# Altium PCB fat34.PcbDoc
Units mm, origin at the board's own origin, x right, y up, seen from the top; angles counter-clockwise.
Board outline 354.7 x 156.7 mm, 2 copper layers (Top Layer, Bottom Layer); 91 components, 541 nets, 370 pads, 259 vias.
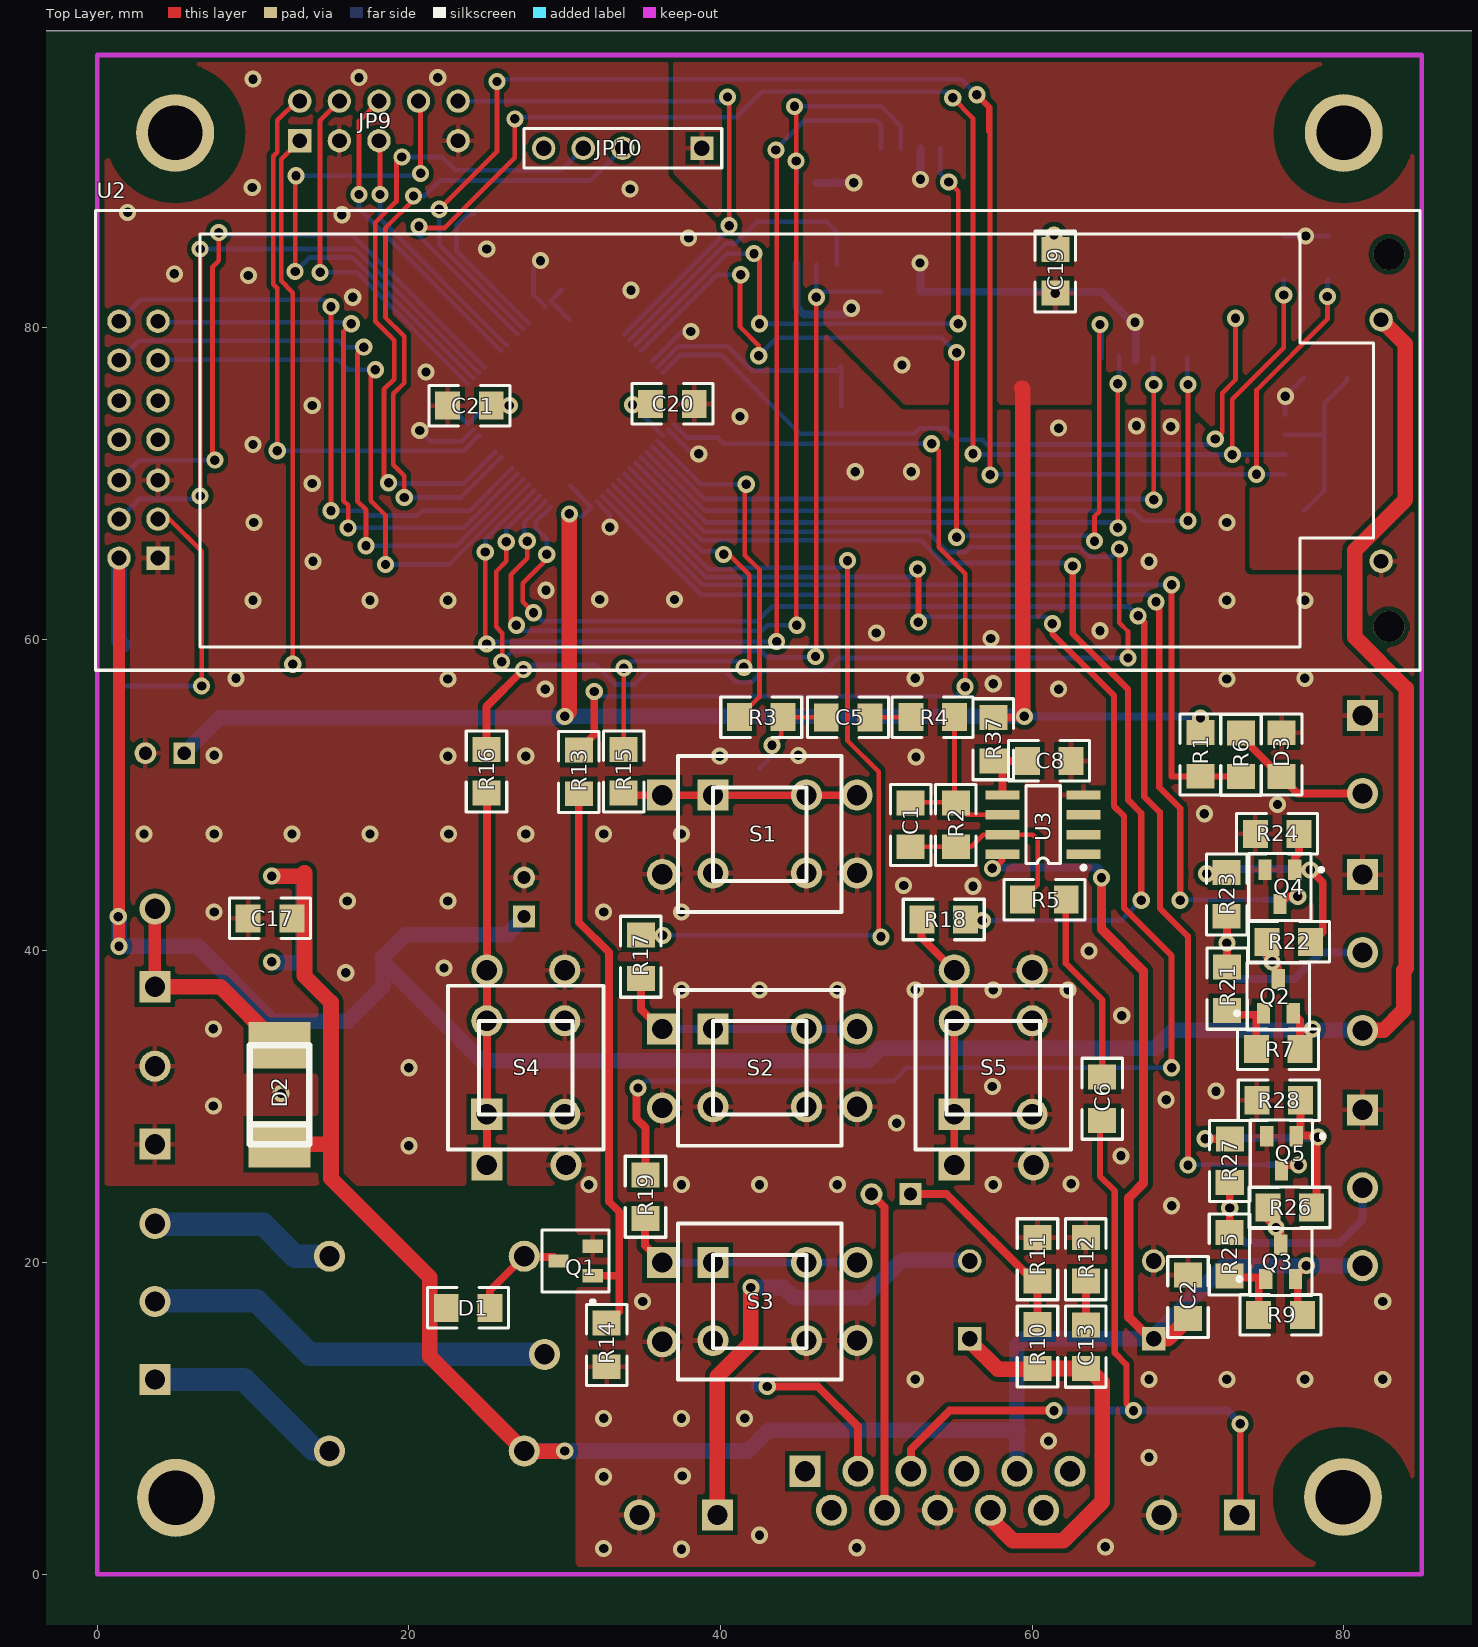
[diagram p0: Top Layer view]
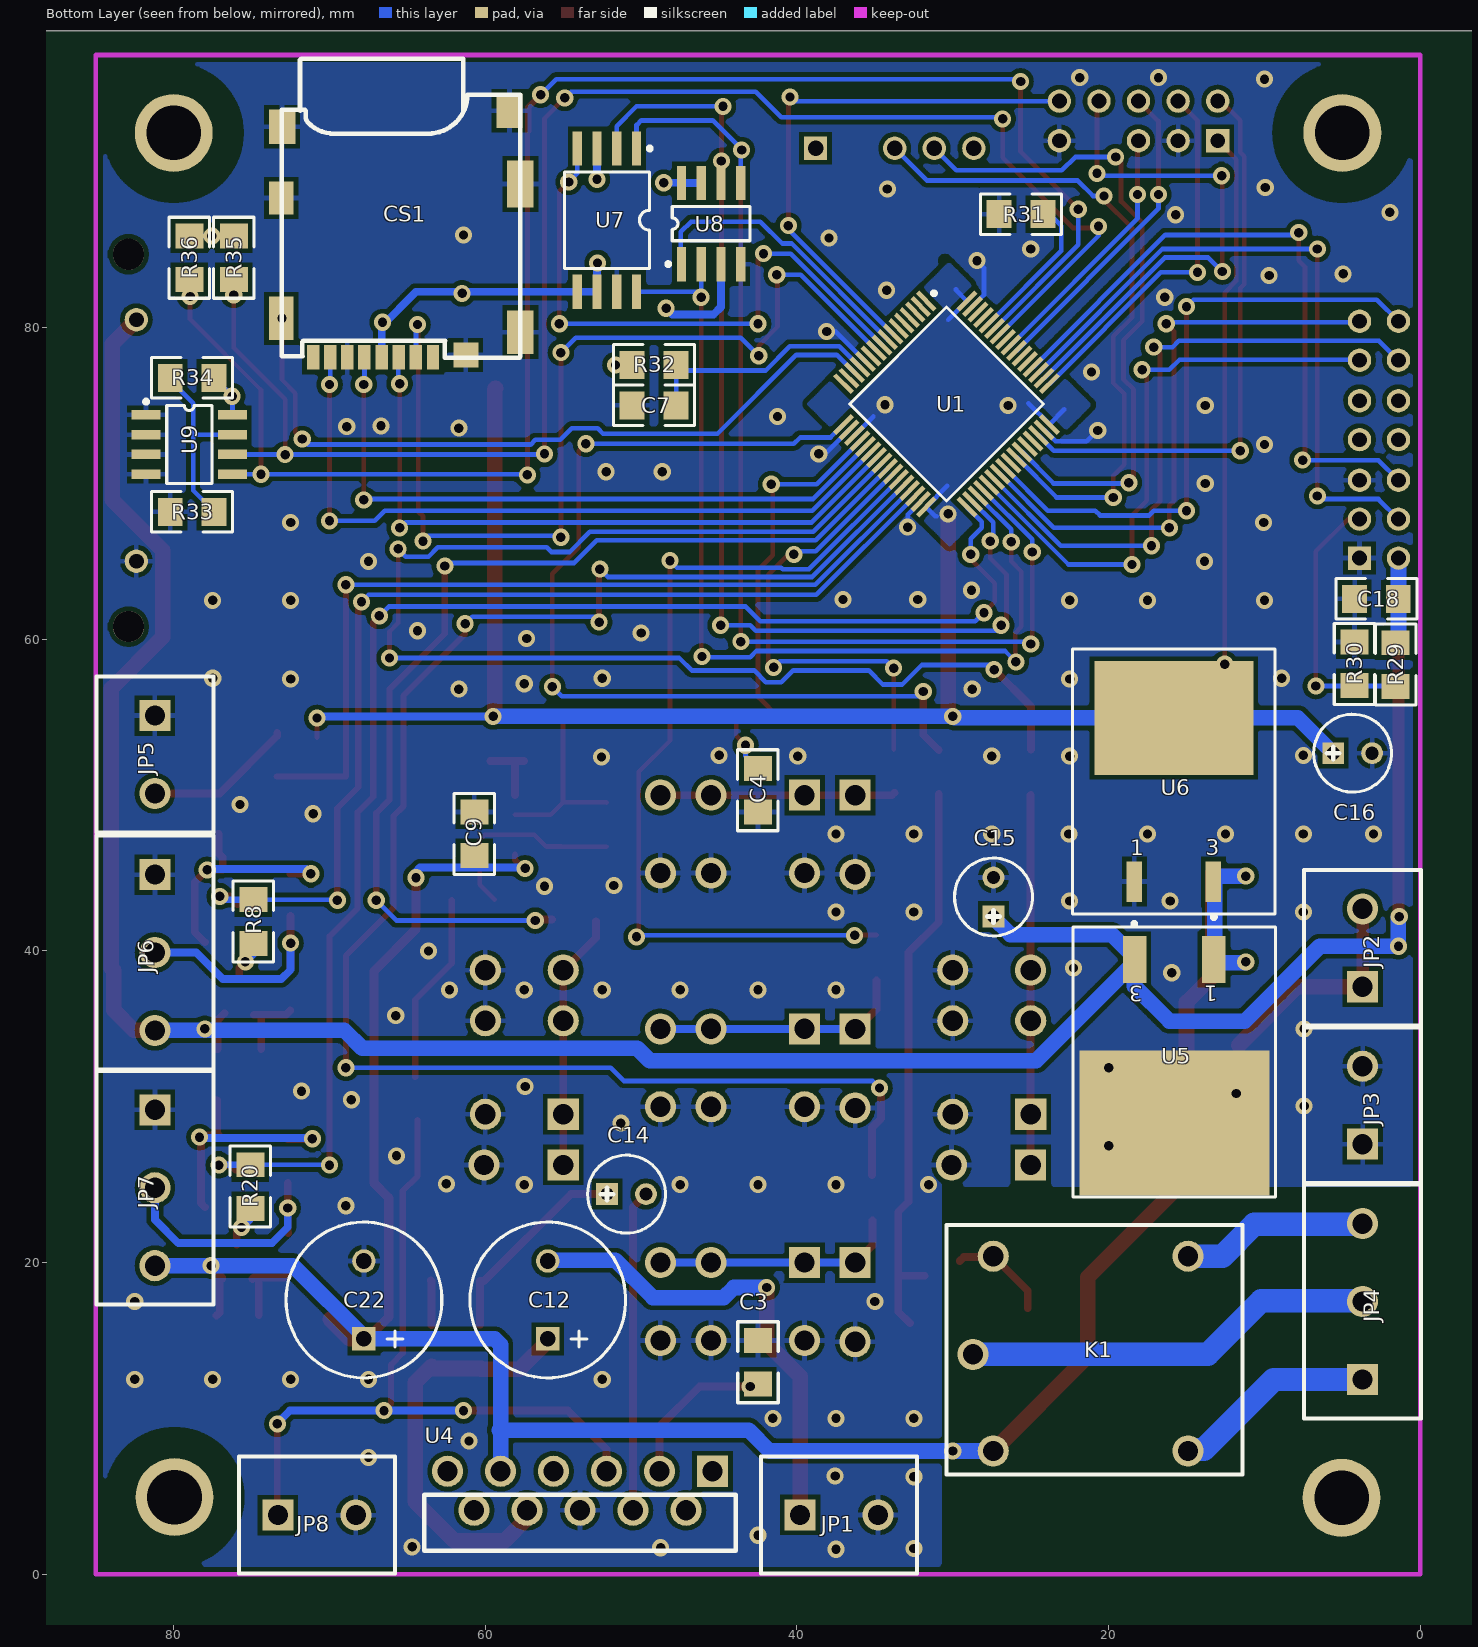
[diagram p1: Bottom Layer view, seen from below]

## Layer stack, top to bottom
Top Layer: signal copper 0.0356
Dielectric: dielectric 0.32, FR-4, Dk 4.8
Bottom Layer: signal copper 0.0356

## Board outline
-133.45,103.2 -133.45,-53.5 220.55,-53.5 220.55,99.05 -133.8,99.05 -133.8,-53.5 -134.15,-53.5

## Design rules (kind name [scope] priority, off if disabled: settings)
Clearance Clearance_1 [InPoly vs HasPad('Free-0')] p1: gap=2
Clearance Keep_Out [OnLayer('Keep-Out Layer')] p2: gap=0.3
Clearance Poly [InPoly] p3: gap=0.3
Clearance [All] p4: gap=0.2
ComponentClearance [All] p1: gap=0.254 collisioncheckmode=0
HoleSize [All] p1: absolutevalues=TRUE maxlimit=5 minlimit=0.025 maxpercent=80.000 minpercent=20.000
PolygonConnect PolygonConnect_1 [InComponent(U5)] p1: connectstyle=Direct reliefconductorwidth=0.254 reliefentries=4 polygonreliefangle="90 Angle"
PolygonConnect [All] p2: connectstyle=Relief reliefconductorwidth=0.3 reliefentries=4 polygonreliefangle="90 Angle"
RoutingLayers [All] p1: top layer=Horizontal bottom layer=Vertical
RoutingVias [All] p1: holewidth=0.6 width=1.1 viastyle="Through Hole" minholewidth=0.6 minwidth=1.1 maxholewidth=0.7 maxwidth=1.2
SolderMaskExpansion [All] p1: expansion=0.102
TestPointUsage [All] p1: valid=0 allowmultiple=FALSE
Testpoint [All] p1: side=15 testpointundercomponent=TRUE minsize=1.016 maxsize=2.54 preferedsize=1.524 minholesize=0 maxholesize=1.016 preferedholesize=0.813 testpointgrid=0.025 style=1023 order=1234567890
Width [All] p1: maxlimit=2 minlimit=0.2 preferedwidth=0.254 toplayer_prefwidth=1 bottomlayer_prefwidth=1 minimp=50.000000 maximp=50.000000 favimp=50.000000
15 further rules are at their usual default settings.

## Classes and differential pairs
component class FAT34p: C15 C16 C17 C18 C19 C20 C21 C22 D1 D2 JP2 JP3 JP4 K1 Q1 R13 R14 U5 U6
component class FAT34: C1 C2 C3 C4 C5 C6 C7 C8 C9 C12 C13 C14 CS1 D3 JP1 JP5 JP6 JP7 JP8 JP9 JP10 Q2 Q3 Q4 Q5 R1 R2 R3 R4 R5 R6 R7 R8 R9 R10 R11 R12 R15 R16 R17 R18 R19 R20 R21 R22 R23 R24 R25 R26 R27 R28 R29 R30 R31 R32 R33 R34 R35 R36 R37 S1 S2 S3 S4 S5 U1 U2 U3 U4 U7 U8 U9

## Components (designator, comment, footprint, x,y, rotation, side; value= is the part's Value field where it differs from the comment)
C1 "*" _1206#1 52.2,48.1 r90 top
C2 "*" C3216-1206 70,17.8 r90 top
C3 "*" C3216-1206 42.5,13.6 r90 bottom
C4 "*" _1206#1 42.5,50.3 r270 bottom
C5 "*" _1206#1 48.2,55 r0 top
C6 "*" _1206#1 64.5,30.5 r270 top
C7 "1.0" _1206#2 49.2,75 r0 bottom (schematic designator C?)
C8 "1.0" _1206#1 61.1,52.2 r0 top
C9 "1.0" _1206#1 60.7,47.5 r270 bottom
C12 "1000 x 25" el5 56,20.1 r270 bottom
C13 "0.1" C3216-1206 63.45,14.6 r270 top
C14 "22.0 x 16" el3 52.2,24.4 r180 bottom
C15 "" el3 27.4,42.2 r90 bottom
C16 "" el3 5.6,52.7 r180 bottom
C17 "Cap" _1206#1 11.1,42.1 r0 top
C18 "Cap" _1206#1 2.8,62.6 r180 bottom
C19 "Cap" _1206#1 61.5,83.6 r270 top
C20 "Cap" _1206#1 36.9,75.1 r180 top
C21 "Cap" _1206#1 23.9,75 r0 top
C22 "" el5 67.8,20.1 r270 bottom
CS1 "MICROSD-ADAPTER" microSD_1 73.9,94.7 r0 bottom
D1 "BAV103" _1206d#1 23.8,17.1 r0 top
D2 "10BQ100" D_6_3 11.7,27.6 r90 top
D3 "BZV55-C5V6" _1206d#2 76,52.6 r90 top
JP1 "BT5-2" BT5-2-1#1 37.3,3.8 r180 bottom
JP2 "BT5-2" BT5-2-1#1 3.7,40.2 r90 bottom
JP3 "BT5-2" BT5-2-1#1 3.7,30.1 r90 bottom
JP4 "Header 3" BT5-3#1 3.7,12.5 r90 bottom
JP5 "BT5-2" BT5-2-1#2 81.2,52.6 r270 bottom
JP6 "Header 3" BT5-3#2 81.2,44.9 r270 bottom
JP7 "Header 3" BT5-3#2 81.2,29.8 r270 bottom
JP8 "BT5-2" BT5-2-1#2 70.8,3.8 r180 bottom
JP9 "CORTEX_DEBUG_CONNECTOR_PAL" CORTEX_DEBUG_CONNECTOR 13,92 r0 top (schematic designator JP?)
JP10 "UART_PORT" HDR1X5_uart 38.8,91.5 r180 top
K1 "BS115" BS115 27.4,20.4 r270 bottom
Q1 "BC847" SO-G3#1 30.7,20.1 r90 top
Q2 "BC856" SO-G3#2 75.8,37.1 r0 top
Q3 "BC856" SO-G3#2 75.95,20.05 r0 top
Q4 "BC847" SO-G3#2 75.9,44.1 r180 top
Q5 "BC847" SO-G3#2 76,27 r180 top
R1 "680R" _1206#1 70.8,52.6 r270 top
R2 "*" _1206#1 55.1,48.1 r90 top
R3 "*" _1206#1 42.6,55 r180 top
R4 "*" _1206#1 53.6,55 r180 top
R5 "*" _1206#1 60.8,43.3 r0 top
R6 "100R" _1206#1 73.4,52.6 r90 top
R7 "*" _1206#1 75.8,33.7 r0 top
R8 "*" _1206#1 74.9,41.9 r90 bottom
R9 "*" _1206#1 75.95,16.65 r0 top
R10 "1K0" _1206#1 60.35,14.6 r270 top
R11 "1K0" _1206#1 60.35,20.2 r270 top
R12 "3R0" _1206#1 63.45,20.2 r270 top
R13 "Res2" _1206#1 30.9,51.5 r90 top
R14 "Res2" _1206#1 32.7,14.7 r270 top
R15 "10K" _1206#2 33.8,51.5 r270 top
R16 "10K" _1206#2 25,51.5 r270 top
R17 "10K" _1206#2 34.9,39.6 r270 top
R18 "10K" _1206#2 54.3,42 r180 top
R19 "10K" _1206#2 35.2,24.2 r270 top
R20 "*" _1206#2 75.1,24.9 r90 bottom
R21 "*" _1206#2 72.5,37.6 r90 top
R22 "*" _1206#2 76.5,40.6 r0 top
R23 "*" _1206#2 72.5,43.6 r270 top
R24 "*" _1206#2 75.7,47.5 r180 top
R25 "*" _1206#2 72.65,20.55 r90 top
R26 "*" _1206#2 76.55,23.55 r0 top
R27 "*" _1206#2 72.7,26.5 r270 top
R28 "*" _1206#2 75.8,30.4 r180 top
R29 "100K" _1206#2 1.6,58.4 r90 bottom
R30 "100R" _1206#2 4.2,58.4 r270 bottom
R31 "10K" _1206#2 25.6,87.3 r180 bottom
R32 "100R" _1206#2 49.2,77.6 r0 bottom (schematic designator R?)
R33 "10K" _1206#2 78.8,68.2 r180 bottom (schematic designator R?)
R34 "10K" _1206#2 78.8,76.8 r180 bottom (schematic designator R?)
R35 "1K0" _1206#1 76.15,84.5 r90 bottom
R36 "1K0" _1206#1 79,84.5 r90 bottom
R37 "1K0" _1206#1 57.5,53.6 r90 top
S1 "SWT-6" SWT-6-9 42.5,47.5 r0 top
S2 "SWT-6" SWT-6-9 42.5,32.5 r0 top
S3 "SWT-6" SWT-6-9 42.5,17.5 r0 top
S4 "SWT-6" SWT-6-9 27.5,32.5 r90 top
S5 "SWT-6" SWT-6-9 57.5,32.5 r90 top
U1 "STM32F100R" F-QFP10X10-G64/N 30.4,75.1 r225 bottom (schematic designator U2)
U2 "" AC-162A -0.1,58 r0 top (schematic designator U1)
U3 "LM358M" SO-G8#1 60.7,48.1 r90 top
U4 "TDA7253" Clipwatt11 45.4,6.6 r0 bottom
U5 "MC7805ACD2T" D2PAK 15.8,34.2 r0 bottom
U6 "REG1117-3.3" SIP-G3/E13 15.8,49.7 r180 bottom
U7 "AT45DB161D-SU" SO-G8/G7 52.2,86.9 r0 bottom
U8 "25LC640" SO-G8#2 45.5,86.7 r180 bottom
U9 "ST24C01M6" SO-G8/E2.9 79,72.5 r270 bottom

## Footprints (in the part's own frame and the unit in brackets; to place one, negate y for a bottom-side part, rotate by r counter-clockwise, add the part's x,y. Pads: shape width x height; smd on the part's side, far side on the other; paste and mask are expansions set on the pad)
_1206#1 [mm]
  rect 1.6x1.8 smd: 1(-1.412,-0.007) 2(1.388,-0.007)
  silkscreen extent -2.61,-1.31 2.59,1.29
_1206#2 [mm]
  rect 1.6x1.8 smd: 1(-1.424,-0.017) 2(1.376,-0.017)
  silkscreen extent -2.62,-1.32 2.58,1.28
_1206d#1 [mm]
  rect 1.6x1.8 smd: 1(1.395,-0.009) 2(-1.405,-0.009)
  silkscreen extent -2.6,-1.31 2.6,1.29
_1206d#2 [mm]
  rect 1.6x1.8 smd: 1(1.4,-0.011) 2(-1.4,-0.011)
  silkscreen extent -2.6,-1.31 2.6,1.29
AC-162A [mm]
  round 2 hole 2: 0(82.996,2.812) 0(82.996,26.712)
  rect 1.5x1.5 hole 0.95: 1(3.996,7.212)
  round 1.5 hole 0.95: 2(1.496,7.212) 3(3.996,9.712) 4(1.496,9.712) 5(3.996,12.212) 6(1.496,12.212) 7(3.996,14.812) 8(1.496,14.812) 9(3.996,17.312) 10(1.496,17.312) 11(3.996,19.912) 12(1.496,19.912) 13(3.996,22.412) 14(1.496,22.412) 15(82.496,22.512) 16(82.496,7.012)
  silkscreen extent 0,0.01 85,29.51
BS115 [mm]
  round 2 hole 1.3: 1(6.292,-1.304) 2(-0.008,12.496) 3(12.492,12.496) 4(-0.008,-0.004) 5(12.492,-0.004)
  silkscreen extent -2.01,-3 13.99,16
BT5-2-1#1 [mm]
  round 2 on Bottom Overlay: 0(-2.5,-4)
  rect 2x2 hole 1.3: 1(-2.5,0)
  round 2 hole 1.3: 2(2.5,0)
  silkscreen extent -5,-3.75 5,3.75
BT5-2-1#2 [mm]
  round 2 on Bottom Overlay: 0(-2.508,-4.008)
  rect 2x2 hole 1.3: 1(-2.508,-0.008)
  round 2 hole 1.3: 2(2.492,-0.008)
  silkscreen extent -5.01,-3.76 4.99,3.74
BT5-3#1 [mm]
  round 2 on Bottom Overlay: 0(-0.001,-4.001)
  rect 2x2 hole 1.3: 1(-0.001,-0.001)
  round 2 hole 1.3: 2(4.999,-0.001) 3(9.999,-0.001)
  silkscreen extent -2.5,-3.75 12.5,3.75
BT5-3#2 [mm]
  round 2 on Bottom Overlay: 0(0.001,-4.004)
  rect 2x2 hole 1.3: 1(0.001,-0.004)
  round 2 hole 1.3: 2(5.001,-0.004) 3(10.001,-0.004)
  silkscreen extent -2.5,-3.75 12.5,3.75
C3216-1206 [mm]
  rect 1.6x1.8 smd: 1(-1.4,0) 2(1.4,0)
  silkscreen extent -2.6,-1.3 2.6,1.3
Clipwatt11 [mm]
  rect 2x2 hole 1.3: 1(0.022,-0.004)
  round 2 hole 1.3: 2(1.722,2.496) 3(3.422,-0.004) 4(5.122,2.496) 5(6.822,-0.004) 6(8.522,2.496) 7(10.222,-0.004) 8(11.922,2.496) 9(13.622,-0.004) 10(15.322,2.496) 11(17.022,-0.004)
  silkscreen extent -1.48,1.5 18.52,5.1
CORTEX_DEBUG_CONNECTOR [mm]
  rect 1.5x1.5 hole 0.95: 1(0,0)
  round 1.5 hole 0.95: 2(0,2.54) 3(2.54,0) 4(2.54,2.54) 5(5.08,0) 6(5.08,2.54) 8(7.62,2.54) 9(10.16,0) 10(10.16,2.54)
D2PAK [mm]
  rect 1.5x3 smd: 1(-2.557,-5.251) 3(2.523,-5.251)
  rect 12.2x9.3 smd: 4(-0.017,5.249)
  silkscreen extent -6.52,-8.1 6.48,10
D_6_3 [mm]
  rect 3x4 smd: 1(6.341,0.006) 2(-0.009,0.006)
  silkscreen extent -0.01,-1.9 6.34,1.91
el3 [mm]
  rect 1.4x1.4 hole 0.85: 1(0.011,-0.008)
  round 1.4 hole 0.85: 2(2.511,-0.008)
  silkscreen extent -1.24,-2.51 3.76,2.49
el5 [mm]
  rect 1.5x1.5 hole 1: 1(5.001,0.007)
  round 1.5 hole 1: 2(0.001,0.007)
  silkscreen extent -2.5,-4.99 7.5,5
F-QFP10X10-G64/N [mm]
  rect 1.6x0.3 smd: 1(-5.6,3.75) 2(-5.6,3.25) 3(-5.6,2.75) 4(-5.6,2.25) 5(-5.6,1.75) 6(-5.6,1.25) 7(-5.6,0.75) 8(-5.6,0.25) 9(-5.6,-0.25) 10(-5.6,-0.75) 11(-5.6,-1.25) 12(-5.6,-1.75) 13(-5.6,-2.25) 14(-5.6,-2.75) 15(-5.6,-3.25) 16(-5.6,-3.75) 33(5.6,-3.75) 34(5.6,-3.25) 35(5.6,-2.75) 36(5.6,-2.25) 37(5.6,-1.75) 38(5.6,-1.25) 39(5.6,-0.75) 40(5.6,-0.25) 41(5.6,0.25) 42(5.6,0.75) 43(5.6,1.25) 44(5.6,1.75) 45(5.6,2.25) 46(5.6,2.75) 47(5.6,3.25) 48(5.6,3.75)
  rect 0.3x1.6 smd: 17(-3.75,-5.6) 18(-3.25,-5.6) 19(-2.75,-5.6) 20(-2.25,-5.6) 21(-1.75,-5.6) 22(-1.25,-5.6) 23(-0.75,-5.6) 24(-0.25,-5.6) 25(0.25,-5.6) 26(0.75,-5.6) 27(1.25,-5.6) 28(1.75,-5.6) 29(2.25,-5.6) 30(2.75,-5.6) 31(3.25,-5.6) 32(3.75,-5.6) 49(3.75,5.6) 50(3.25,5.6) 51(2.75,5.6) 52(2.25,5.6) 53(1.75,5.6) 54(1.25,5.6) 55(0.75,5.6) 56(0.25,5.6) 57(-0.25,5.6) 58(-0.75,5.6) 59(-1.25,5.6) 60(-1.75,5.6) 61(-2.25,5.6) 62(-2.75,5.6) 63(-3.25,5.6) 64(-3.75,5.6)
  silkscreen extent -5.72,-4.4 4.4,4.57
HDR1X5_uart [mm]
  rect 1.5x1.5 hole 1: 1(-0.008,-0.009)
  round 1.5 hole 1: 3(5.072,-0.009) 4(7.612,-0.009) 5(10.152,-0.009)
  silkscreen extent -1.28,-1.28 11.42,1.26
microSD_1 [mm]
  rect 1.7x3 smd: 0(-16.15,5.475)
  rect 1.7x2.8 smd: 0(-16.15,15)
  rect 1.7x2.2 smd: 0(-15.45,0.775) 0(-0.85,1.8)
  rect 1.6x1.6 smd: 0(-12.65,16.45)
  rect 0.8x1.6 smd: 1(-10.54,16.6) 2(-9.44,16.6) 3(-8.34,16.6) 4(-7.24,16.6) 5(-6.14,16.6) 6(-5.04,16.6) 7(-3.94,16.6) 8(-2.84,16.6)
  rect 1.6x2.8 smd: 9(-0.8,14.1)
  rect 1.6x2.1 smd: 10(-0.8,6.375)
  silkscreen extent -16.15,-2.55 -0.82,16.63
SIP-G3/E13 [mm]
  rect 1x2.6 smd: 1(-2.551,-5.246) 3(2.529,-5.246)
  rect 10.2x7.3 smd: 4(-0.011,5.254)
  silkscreen extent -6.51,-8.1 6.49,9.68
SO-G3#1 [mm]
  rect 0.85x1.3 smd: 1(-0.948,-1.102) 2(0.952,-1.102) 3(0.002,1.098)
  silkscreen extent -2.77,-2.15 2,2.15
SO-G3#2 [mm]
  rect 0.85x1.3 smd: 1(-0.95,-1.106) 2(0.95,-1.106) 3(0,1.094)
  silkscreen extent -2.77,-2.16 2,2.14
SO-G8#1 [mm]
  rect 0.6x2.2 smd: 1(-1.905,-2.6) 2(-0.635,-2.6) 3(0.635,-2.6) 4(1.905,-2.6) 5(1.905,2.6) 6(0.635,2.6) 7(-0.635,2.6) 8(-1.905,2.6)
  silkscreen extent -2.88,-2.72 2.5,1.1
SO-G8#2 [mm]
  rect 0.6x2.2 smd: 1(-1.913,-2.623) 2(-0.643,-2.623) 3(0.627,-2.623) 4(1.897,-2.623) 5(1.897,2.577) 6(0.627,2.577) 7(-0.643,2.577) 8(-1.913,2.577)
  silkscreen extent -2.89,-2.75 2.49,1.08
SO-G8/E2.9 [mm]
  rect 0.6x1.85 smd: 1(-1.905,-2.775) 2(-0.635,-2.775) 3(0.635,-2.775) 4(1.905,-2.775) 5(1.905,2.775) 6(0.635,2.775) 7(-0.635,2.775) 8(-1.905,2.775)
  silkscreen extent -2.88,-2.9 2.5,1.45
SO-G8/G7 [mm]
  rect 0.6x2.2 smd: 1(-1.905,-4.6) 2(-0.635,-4.6) 3(0.635,-4.6) 4(1.905,-4.6) 5(1.905,4.6) 6(0.635,4.6) 7(-0.635,4.6) 8(-1.905,4.6)
  silkscreen extent -2.88,-4.72 2.73,3.1
SWT-6-9 [mm]
  rect 2x2 hole 1.3: 1(-6.234,2.497) 1(-2.984,2.499)
  round 2 hole 1.3: 1(3.016,2.499) 1(6.266,2.497) 2(-6.234,-2.583) 2(-2.984,-2.501) 2(3.016,-2.501) 2(6.266,-2.503)
  silkscreen extent -5.23,-5 5.27,5

## Part data
C1 C2 C3 C4 C5 C6 C7 C8 C13: library part "Cap Semi", "Capacitor (Semiconductor SIM Model)"
C9: library part Cap, "Capacitor"
C12 C14 C22: library part "Cap Pol1", "Polarized Capacitor (Radial)"
C15 C16: library part "Cap Pol", "Polarized Capacitor (Radial)"
C17 C18 C19 C20 C21: "Capacitor"
D1 D2: library part 10BQ015, "Schottky Rectifier"
D3: library part "D Zener", "Zener Diode"
JP1 JP2 JP3 JP4 JP5 JP6 JP7 JP8: "Header, 3-Pin"
JP10: "Header, 5-Pin"
K1: "Single-Pole Dual-Throw Relay"
Q1 Q4 Q5: library part BC847ALT1, "General Purpose Transistor NPN Silicon"
Q2 Q3: library part GT109
R1 R2 R3 R4 R5 R6 R7 R8 R9 R21 R22 R23 R24 R25 R26 R27 R28 R32 R37: library part Res2, "Resistor"
R10 R11 R12 R15 R16 R17 R18 R19 R20 R29 R30 R31 R33 R34 R35 R36: library part RES, "Resistor"
R13 R14: "Resistor"
S1 S2 S3 S4 S5: "Switch"
U1: "STM32 ARM-based 32-bit MCU with 64 Kbytes Flash, 64-pin LQFP, Industrial Temperature"
U2: library part AC-162A
U3: "Low-Power Dual Operational Amplifier"
U5: "Three-Terminal Positive Voltage Regulator"
U6: "800mA and 1A Low Dropout Positive Regulator 2.85V, 3.3V, 5V, and Adjustable"
U8: "Memory"
U9: "Serial 1K (128 x 8) EEPROM"

## Free pads (board coordinates)
  round 5 hole 3.5: 0(5,92.5) 0(79.95,4.95) 0(80,92.5) 3(5.05,4.9)

## Via types
v1: diameter 1.1, hole 0.6, Top Layer to Bottom Layer, 259 vias

## Nets (pads, with @x,y where several pads share a name; then routed paths per layer and width w, separated by ;. In a path a pad name is that pad's centre, name@x,y a point inside that pad or via, vN(x,y) a via of type N, cw(c..) or ccw(c..) an arc to the next point about the centre after c; other vN are vias at no path point)
+3.3V: 
+3V3: C16.1 C19.2 C20.2 C21.2 CS1.4 JP9.1 JP10.1 R1.1 R32.2 R34.2 R35.2 R36.2 R37.2 U1.19 U1.32 U1.48 U1.64 U6.4 U7.3 U7.5 U7.6 U8.3 U8.7 U8.8 U9.8 | length 184.5
  Top Layer w0.3: v1(12.55,58.4) 12.55,82.25 11.8,83 11.8,90.8 JP9.1 ; v1(52.835,89.515) v1@52.835,89.6 ; R1.1@70.8,53.7 v1(70.8,54.95) ; v1(76.249,75.601) v1@76.25,75.6
  Top Layer w0.5: R37.2 59.438,54.988 v1(59.5,55.05) v1@59.45,55.05
  Top Layer w1: v1(30,55.05) 30.3,55.35 v1(30.3,68.05) ; 59.35,76.1 59.4,76.05 59.4,55.15 v1(59.5,55.05)
  Bottom Layer w0.3: 22.85,74.75 23.789,73.811 U1.48 25.147,75.15 ; 29.8,82.45 29.8,82.419 U1.64 30.3,80.503 30.3,80.5 ; 30.35,69.85 30.35,69.847 U1.32 31.119,67.9 31.05,67.9 ; 35.1,74.3 35.1,74.289 U1.19 ; R35.2 R36.2 ; U9.8 76.225,75.584 R34.2 ; v1(76.249,75.601) v1@76.249,75.608
  Bottom Layer w0.5: U8.3 44.873,81.327 45.35,80.85 48,80.85 v1(48.4,81.25) ; U8.7 47.277,89.277 47.35,89.35 47.4,89.3 v1(48.55,89.3) ; v1(52.8,84.15) 52.835,84.115 U7.6 54.15,82.3 64.45,82.3 66.65,80.1 CS1.4@66.65,77.9 ; U7.3 v1(52.835,89.515) v1@52.85,89.5 ; v1(59.5,55.05) 70.7,55.05 v1(70.8,54.95)
  Bottom Layer w1: C16.1 7.851,54.954 29.904,54.954 v1(30,55.05) v1(59.5,55.05)
  other v1: 26.45,75 34.35,75.05 51.65,77.6 66.599,80.35 61.493,82.2 77.55,85.888
+3V_: 
+5V: C15.1 C18.2 JP6.3 Q2.2 R7.2 R29.2 U2.2 U2.15 U5.3 | length 184.9
  Top Layer w0.5: Q2.2 77.188,35.556 R7.2 ; 77.188,34.95 78,34.95 v1(78,35)
  Top Layer w0.8: U2.2 1.396,40.304 v1(1.4,40.3)
  Top Layer w1: JP6.3 82.548,34.899 83.85,36.201 83.85,38.75 83.999,38.899 83.999,56.85 80.7,60.15 80.7,65.7 83.95,68.95 83.95,78.958 U2.15
  Bottom Layer w1: v1(1.35,42.2) 1.4,42.15 v1(1.4,40.3) 6.45,40.3 11.25,35.5 16.1,35.5 18.35,37.75 U5.3@18.35,39.6 ; U2.2 1.396,59.904 R29.2@1.65,59.65 ; U5.3@18.3,39.6 U5.3@18.35,39.6 ; U5.3@18.35,39.25 24.65,32.95 49.45,32.95 50.25,33.75 67.9,33.75 69.049,34.899 JP6.3 ; C15.1@27.4,42.15 26.3,41.05 19.8,41.05 U5.3@18.35,39.6
+5V_IZ: 
+12V: C2.1 C9.2 C17.2 C22.1 D1.2 D2.2 JP7.3 K1.5 Q3.2 R9.2 U3.8 U4.9 U5.1 U6.3 | length 172.9
  Top Layer w0.4: v1(57.45,45.3) 57.5,45.25 58.1,45.85 U3.8
  Top Layer w0.5: Q3.2 Q3.2@76.9,19.05 ; R9.2@77.25,16.6 77.05,16.8 77.05,19.25 v1(77.6,19.8) 77.65,19.8 v1@77.625,19.775
  Top Layer w0.6: v1(64.45,44.7) 64.45,41.4 67.15,38.7 67.15,25.1 66.2,24.15 66.2,16.5 C22.1@67.75,14.95
  Top Layer w1: v1@11.15,39.25 v1(11.2,39.3) ; v1(11.2,44.8) 13.1,44.8 13.3,45 13.3,38.4 15,36.7 15,25.4 21.35,19.05 21.35,13.962 K1.5 v1@29.95,7.9 ; D2.2 14.959,27.591 15,27.55 ; C22.1 68.699,15.099 C2.1@69.95,16.35
  Bottom Layer w0.5: v1(57.45,45.3) 57.5,45.35 64.2,45.35 64.5,45.05 64.5,44.65 v1(64.45,44.7)
  Bottom Layer w1: v1(11.2,39.3) 11.2,39.25 13.25,39.25 13.2,39.3 13.2,44.65 13.05,44.8 v1(11.2,44.8) ; K1.5 41.758,7.908 43.1,9.25 59.1,9.25 59.022,9.172 ; U4.9 59.022,14.722 59.4,15.1 C22.1@67.85,15.1 ; C22.1@67.7,15.099 67.7,15.15 72.35,19.8 JP7.3@81.3,19.8
  other v1: 30,7.908
+12VI: 
+IAKB1: 
+IAKB2: 
+UOUT: 
-5V: 
-5V_IZ: 
-IAKB1: 
-IAKB2: 
-UOUT: 
BAT: 
C0: 
CAN: 
CS0: 
CS1: 
D4: 
D7: 
D7: 
DT1: 
DT1: 
DT2: 
DT3: 
DT4: 
DT5: 
GND: C2.2 C3.2 C4.2 C7.2 C8.2 C9.1 C15.2 C16.2 C17.1 C18.1 C19.1 C20.1 C21.1 C22.2 CS1.0 CS1.6 CS1.10 D3.1 JP1.2 JP3.1 JP3.2 JP5.1 JP6.1 JP7.1 JP8.2 JP9.3 JP9.9 Q1.2 Q4.2 Q5.2 R11.1 R12.1 R14.2 R24.2 R28.2 R30.1 R31.1 R33.1 S1.2 S2.2 S3.2 S4.2 S5.2 U1.12 U1.18 U1.31 U1.47 U1.63 U2.1 U2.5 U2.16 U3.4 U4.6 U5.4 U6.1 U7.7 U8.4 U9.1 U9.2 U9.3 U9.4 | length 15.4
  Top Layer w0.3: U2.5@3.896,70.204 U2.5
  Bottom Layer w0.3: v1(20.7,73.4) 21.4,72.7 23.404,72.7 U1.47 ; v1(28.45,84.3) 28,83.85 28,82.096 U1.63 ; U1.31 32.9,68.004 v1(32.9,67.2) ; U1.12 37.525,79.75 v1(38.1,79.75) ; U1.18 38.196,71.9 v1(38.6,71.9)
  other v1: 37.5,1.6 32.5,1.65 48.75,1.7 64.699,1.75 42.5,2.5 32.5,6.25 37.55,6.3 67.5,7.5 61.05,8.55 32.5,10 37.5,10 41.55,10 52.5,12.5 67.499,12.5 72.5,12.5 77.5,12.5 82.5,12.5 35,17.5 82.5,17.5 68.95,23.65 31.55,25 37.5,25 42.5,25 47.5,25 57.5,25 62.5,25.05 65.699,26.85 20,27.5 51.3,28.95 7.45,30.05 68.599,30.45 11.8,30.85 71.799,31 57.45,31.3 20,32.5 7.45,35 65.75,35.85 37.5,37.5 42.5,37.5 47.5,37.5 52.5,37.5 57.499,37.5 62.3,37.5 15.95,38.6 22.25,38.9 63.65,40 7.5,42.5 32.5,42.5 37.5,42.5 16.05,43.2 22.5,43.2 56.199,44.15 51.75,44.2 3,47.5 7.5,47.5 12.5,47.5 17.5,47.5 22.55,47.5 27.5,47.5 32.5,47.5 37.5,47.5 71.05,48.8 75.75,49.4 52.55,52.45 22.5,52.5 27.5,52.5 39.95,52.5 7.5,52.55 45,52.55 28.75,56.8 61.7,56.8 57.5,57.15 22.5,57.45 72.5,57.45 8.9,57.5 52.5,57.5 77.499,57.5 57.35,60.05 50,60.4 64.35,60.55 10,62.5 17.5,62.5 22.5,62.5 72.5,62.5 77.5,62.5 32.25,62.55 37.05,62.55 28.8,63.15 13.85,65 67.5,65 10.05,67.5 72.5,67.5 13.8,70 48.65,70.75 52.25,70.75 10,72.5 61.699,73.55 68.899,73.65 66.699,73.7 41.25,74.3 13.8,75 21.1,77.15 16.4,81.95 34.25,82.4 9.7,83.35 4.95,83.45 25,85.05 37.95,85.75 61.4,85.95 15.7,87.25 1.95,87.4 34.2,88.9 9.95,89 10,95.95 16.8,96.05 21.85,96.05
I1: 
MISO: 
MOSI: 
NetA1_1: 
NetA1_1: 
NetA1_2: 
NetA1_2: 
NetA1_2: 
NetA1_2: 
NetA1_2: 
NetA1_2: 
NetA1_2: 
NetBT1_1: 
NetBT2_1: 
NetBT2_2: 
NetC1_1: C1.1 R2.1 R5.1 U3.7 | length 12.9
  Top Layer w0.3: C1.1 55.138,46.688 55.15,46.7 56.1,46.7 56.865,47.465 60.035,47.465 60.35,47.15 60.35,44.256 R5.1
NetC1_2: C1.2 R2.2 R4.1 U3.6 | length 11.7
  Top Layer w0.3: C1.2@52.2,49.5 52.238,49.538 R2.2@55.012,49.538 ; R4.1 R2.2@55.012,49.538 ; U3.6 55.815,48.735 R2.2@55.012,49.538
NetC2_2: 
NetC3_1: C3.1 U4.3 | length 10.4
  Top Layer w0.5: v1(43,12.05) 46.25,12.05 48.822,9.478 U4.3
  Bottom Layer w1: C3.1@42.45,12.15 42.9,12.15 v1(43,12.05)
NetC4_1: C4.1 C5.1 R3.1 | length 6.7
  Top Layer w0.3: v1(43.3,53.2) 43.9,53.8 43.9,54.9 43.993,54.993 C5.1
  Bottom Layer w0.3: C4.1 43.3,52.506 v1(43.3,53.2)
NetC5_2: C5.2 R4.2 | length 2.6
  Top Layer w0.3: C5.2 52.199,54.993 R4.2
NetC6_1: C6.1 R5.2 | length 13.4
  Top Layer w0.3: 62.188,42.162 R5.2
  Top Layer w0.4: R5.2@62.15,43.25 62.15,39.2 64.493,36.857 C6.1
NetC6_2: C6.2 JP8.1 U4.5 | length 49.5
  Top Layer w0.4: C6.2@64.35,29.15 64.35,25.55 65.3,24.6 65.3,14.2 66.05,13.45 66.05,10.95 v1(66.5,10.5) ; v1(73.35,9.65) 73.35,3.8 JP8.1@73.4,3.75
  Top Layer w0.5: U4.5 52.222,8.022 54.7,10.5 v1(61.4,10.5)
  Bottom Layer w0.4: v1@73.3,9.7 v1(73.35,9.65)
  Bottom Layer w0.5: v1(61.4,10.5) 72.55,10.5 v1@73.4,9.65
NetC7_1: C7.1 R32.1 U1.13 | length 15.6
  Bottom Layer w0.3: U1.13 37.282,78.8 40.45,78.8 42,77.25 47.5,77.25 47.75,77.5 C7.1@47.75,74.95
NetC8_1: C8.1 R37.1 U3.5 | length 4.3
  Top Layer w0.5: R37.1 57.512,52.193 C8.1 ; U3.5 58.1,52.05 R37.1@58.15,52.1
NetC11_2: 
NetC12_1: C12.1 C13.2 R10.2 U4.8 | length 27
  Top Layer w1: C12.1@55.9,15 55.95,15 57.8,13.15 60.3,13.15 60.25,13.2 63.3,13.2 63.45,13.35 64.5,12.3 64.5,4.65 62,2.15 58.75,2.15 57.322,3.578 U4.8
NetC12_2: C12.2 JP1.1 | length 30.8
  Top Layer w1: JP1.1 39.8,12.7 41.95,14.85 v1(41.95,18.4)
  Bottom Layer w1: v1(41.95,18.4) 44.05,18.4 44.7,17.75 49.25,17.75 51.65,20.15 C12.2@56,20.15
NetC13_1: C13.1 R12.2 | length 2.9
  Top Layer w0.5: C13.1 63.45,18.8 63.453,18.803 R12.2@63.5,18.85
NetC14_1: C14.1 R10.1 R11.2 | length 13.2
  Top Layer w0.5: C14.1@52.15,24.4 52.158,24.392 54.508,24.392 60.088,18.812 R11.2 ; R11.2@60.3,18.7 60.343,18.657 R10.1
NetC14_2: C14.2 U4.4 | length 20.6
  Top Layer w0.5: C14.2 50.522,23.558 U4.4
NetC21_2: 
NetC22_1: 
NetC22_2: 
NetC23_1: 
NetC30_2: 
NetC30_2: 
NetC31_2: 
NetC36_1: 
NetC45_1: 
NetC45_2: 
NetC46_1: 
NetC46_2: 
NetC47_2: 
NetC48_1: 
NetC48_2: 
NetC49_1: 
NetC50_2: 
NetC51_2: 
NetC52_2: 
NetC53_2: 
NetC61_1: 
NetC61_2: 
NetC62_2: 
NetC63_2: 
NetC66_1: 
NetC500_2: 
NetC502_1: 
NetC502_2: 
NetC505_1: 
NetC505_2: 
NetC508_1: 
NetC510_1: 
NetC511_1: 
NetC511_2: 
NetC512_2: 
NetC512_2: 
NetC512_2: 
NetC513_2: 
NetC514_1: 
NetC516_1: 
NetC516_2: 
NetC517_1: 
NetC517_1: 
NetC517_1: 
NetC600_1: 
NetC600_2: 
NetD1_1: D1.1 K1.4 Q1.3 | length 6.5
  Top Layer w0.5: D1.1 25.195,18.195 27.35,20.35 29.3,20.35 Q1.3@29.55,20.1
NetD2_1: D2.1 JP2.1 JP2.2 | length 14.5
  Top Layer w0.8: JP2.1 JP2.2
  Top Layer w1: JP2.1 7.9,37.7 D2.1@11.65,33.95
NetD2_4: 
NetD2_5: 
NetD3_1: 
NetD3_2: D3.2 JP5.2 R6.2 | length 9.6
  Top Layer w0.5: R6.2@73.35,54 73.35,53.8 77.042,50.108 JP5.2
NetD4_2: 
NetD5_1: 
NetD5_1: 
NetD5_1: 
NetD6_2: 
NetD6_2: 
NetD6_2: 
NetD6_2: 
NetD20_2: 
NetD500_1: 
NetD500_2: 
NetD501_1: 
NetD503_1: 
NetD505_1: 
NetD505_1: 
NetD505_2: 
NetD506_1: 
NetD506_1: 
NetFU500_1: 
NetJ1_2: 
NetJ1_2: 
NetJ1_2: 
NetJ1_3: 
NetJ1_3: 
NetJ1_3: 
NetJ1_4: 
NetJ1_4: 
NetJ1_7: 
NetJ1_7: 
NetJ2_1: 
NetJ4_1: 
NetJ4_2: 
NetJ600_1: 
NetJP1_1: 
NetJP1_1: 
NetJP1_2: 
NetJP1_3: 
NetJP1_7: 
NetJP1_10: 
NetJP2_2: 
NetJP2_3: 
NetJP3_2: 
NetJP3_2: 
NetJP3_2: 
NetJP3_3: 
NetJP3_3: 
NetJP3_3: 
NetJP3_3: 
NetJP3_4: 
NetJP3_4: 
NetJP3_5: 
NetJP3_5: 
NetJP3_7: 
NetJP3_9: 
NetJP4_1: JP4.1 K1.3 | length 13.1
  Bottom Layer w1.5: JP4.1 9.401,12.499 13.9,8 K1.3@14.95,8
NetJP4_2: JP4.2 K1.1 | length 26.5
  Bottom Layer w1.5: JP4.2@3.6,17.55 10.2,17.55 13.642,14.108 K1.1
NetJP4_3: JP4.3 K1.2 | length 12.1
  Bottom Layer w1.5: JP4.3@3.6,22.45 10.65,22.45 12.692,20.408 K1.2
NetJP4_8: 
NetJP4_9: 
NetJP4_10: 
NetJP5_2: 
NetJP5_5: 
NetJP5_6: 
NetJP5_7: 
NetJP5_9: 
NetJP5_10: 
NetJP5_11: 
NetJP5_12: 
NetJP5_13: 
NetJP5_14: 
NetJP5_15: 
NetJP5_16: 
NetJP5_17: 
NetJP5_18: 
NetJP5_19: 
NetJP5_20: 
NetJP6_2: JP6.2 R21.2 R23.2 | length 14.7
  Top Layer w0.5: R21.2@72.5,38.9 R23.2@72.5,42.25
  Bottom Layer w0.5: v1(72.5,40.5) 72.5,38.8 73.1,38.2 76.85,38.2 78.549,39.899 JP6.2
NetJP6_17: 
NetJP7_2: JP7.2 R25.2 R27.2 | length 16.1
  Top Layer w0.5: R25.2@72.65,21.9 72.683,21.933 R27.2
  Bottom Layer w0.5: v1(72.683,23.5) 72.683,22.267 73.7,21.25 79.7,21.25 81.204,22.754 JP7.2
NetJP7_2: 
NetJP7_2: 
NetJP7_5: 
NetJP8_3: 
NetJP8_4: 
NetJP8_5: 
NetJP8_6: 
NetJP100_2: 
NetJP101_1: 
NetJP101_2: 
NetJP101_3: 
NetJP101_4: 
NetJP101_5: 
NetJP101_6: 
NetQ1_1: Q1.1 R13.1 R14.1 | length 37.1
  Top Layer w0.5: R13.1 30.907,41.843 32.85,39.9 32.85,23.9 33.5,23.25 33.5,16.85 R14.1@32.75,16.1 ; Q1.1 33.448,19.152 33.5,19.1
NetQ1_1: 
NetQ1_1: 
NetQ1_2: 
NetQ1_3: 
NetQ2_1: Q2.1 R7.1 R21.1 | length 4.7
  Top Layer w0.5: R21.1 72.793,35.9 Q2.1@74.85,35.9 ; R7.1 74.388,35.888 74.4,35.9
NetQ2_1: 
NetQ2_3: Q2.3 R8.1 R22.1 | length 4.1
  Top Layer w0.5: R22.1@75.05,40.557 75.05,39.65 75.8,38.9 Q2.3
  Bottom Layer w0.5: R8.1 74.893,39.807 v1(75.4,39.3)
NetQ2_3: 
NetQ3_1: 
NetQ3_1: 
NetQ3_1: Q3.1 R9.1 R25.1 | length 5
  Top Layer w0.5: R25.1@72.7,19.1 72.85,19.1 72.9,19.05 74.85,19.05 74.95,18.95 74.9,19 74.65,19 74.538,18.888 R9.1
NetQ3_3: Q3.3 R20.1 R26.1 | length 4.1
  Top Layer w0.5: R26.1@75.1,23.45 75.1,22.8 v1(75.648,22.251) 75.95,21.95 Q3.3
  Bottom Layer w0.5: R20.1@75.1,23.5 75.1,22.8 v1(75.648,22.251)
NetQ4_1: 
NetQ4_1: Q4.1 R22.2 R23.1 R24.1 | length 16.8
  Top Layer w0.5: v1(71.2,44.95) R23.1@72.5,44.95 ; R24.1 77.124,46.274 76.85,46 Q4.1 77.844,45.206 78.65,44.4 78.65,41.2 R22.2@78,40.55
  Bottom Layer w0.5: v1(71.2,44.95) 71.5,45.25 77.8,45.25 v1(77.85,45.2)
NetQ4_3: 
NetQ5_1: 
NetQ5_1: Q5.1 R26.2 R27.1 R28.1 | length 17.5
  Top Layer w0.5: v1(71.1,27.95) 71.126,27.924 R27.1 ; Q5.1@77.1,28.15 78.25,28.15 v1(78.35,28.05) ; R28.1 77.224,28.174 Q5.1@77.248,28.15 ; v1@77.9,28.15 78.25,27.8 78.25,23.8 R26.2@78,23.55
  Bottom Layer w0.5: v1(71.1,27.95) 71.15,28 78.35,28 78.4,28.05 v1(78.35,28.05) v1@78.3,28
NetQ6_1: 
NetQ6_1: 
NetQ7_2: 
NetQ7_2: 
NetQ7_4: 
NetQ7_4: 
NetQ8_2: 
NetQ8_4: 
NetQ9_2: 
NetQ9_4: 
NetQ10_1: 
NetQ10_1: 
NetQ10_3: 
NetQ10_3: 
NetQ11_1: 
NetQ11_1: 
NetQ11_3: 
NetQ500_1: 
NetQ501_1: 
NetQ600_1: 
NetQ600_3: 
NetR3_1: 
NetR3_2: 
NetR3_2: 
NetR3_2: 
NetR3_2: 
NetR4_1: 
NetR4_2: 
NetR5_1: 
NetR6_1: 
NetR7_1: 
NetR7_2: 
NetR8_1: 
NetR8_1: 
NetR8_2: 
NetR8_2: 
NetR13_2: 
NetR14_2: 
NetR15_2: R15.2 S1.1 | length 15.1
  Top Layer w0.5: R15.2@33.75,50.15 33.779,50.121 33.905,49.995 S1.1@48.756,49.995
NetR16_1: 
NetR16_1: 
NetR16_2: R16.2 S4.1 | length 23.7
  Top Layer w0.5: R16.2@25,50 25.005,49.995 S4.1@25.005,26.256
NetR17_2: R17.2 S2.1 | length 16.2
  Top Layer w0.5: R17.2@34.9,38.1 34.9,36.25 S2.1@36.155,34.995
  Bottom Layer w0.5: S2.1@36.155,34.995 S2.1@48.756,34.995
NetR18_2: R18.2 S5.1 | length 16.5
  Top Layer w0.5: R18.2@52.9,41.9 52.9,40.85 55.005,38.745 S5.1@55.005,26.256
NetR19_2: R19.2 S3.1 | length 15.7
  Top Layer w0.5: R19.2@35.15,22.7 35.15,21.1 36.2,20.05 S3.1@36.255,19.995
  Bottom Layer w0.5: S3.1@36.255,19.995 S3.1@48.756,19.995
NetR22_2: 
NetR22_2: 
NetR22_2: 
NetR22_2: 
NetR22_2: 
NetR22_2: 
NetR22_2: 
NetR22_2: 
NetR22_2: 
NetR25_1: 
NetR29_1: R29.1 R30.2 U2.3 | length 17.4
  Top Layer w0.3: U2.3 4.638,67.712 6.7,65.65 v1(6.7,57)
  Bottom Layer w0.3: R29.1@1.65,57 v1(6.7,57)
NetR30_2: 
NetR31_2: R31.2 U1.60 | length 9.6
  Bottom Layer w0.3: R31.2 23.783,87.283 23.05,86.55 23.05,84.925 U1.60
NetR33_2: R33.2 R34.1 U9.7 | length 12.2
  Bottom Layer w0.3: U9.7 78.685,73.135 78.7,73.15 ; R33.2@77.4,68.25 77.45,68.25 78.75,69.55 78.75,75.15 80.224,76.624 R34.1
NetR38_1: 
NetR42_1: 
NetR42_2: 
NetR43_1: 
NetR43_2: 
NetR43_2: 
NetR44_1: 
NetR44_2: 
NetR44_2: 
NetR45_2: 
NetR49_1: 
NetR49_2: 
NetR51_1: 
NetR51_2: 
NetR52_1: 
NetR53_1: 
NetR57_1: 
NetR60_1: 
NetR69_2: 
NetR83_2: 
NetR90_2: 
NetR91_1: 
NetR93_1: 
NetR95_1: 
NetR96_2: 
NetR504_1: 
NetR505_2: 
NetR505_2: 
NetR510_1: 
NetR600_1: 
NetR600_2: 
NetR603_1: 
NetR603_2: 
NetR605_2: 
NetR?_1: 
NetS2_1: 
NetU1_1: 
NetU1_5: 
NetU5_1: 
NetU8_3: 
NetU8_7: 
NetU8_8: 
NetU11_5: 
NetU14_3: 
NetU14_4: 
NetU14_5: 
NetU14_6: 
NetU14_12: 
NetU14_13: 
NetU14_14: 
NetU15_3: 
NetU15_3: 
NetU15_3: 
NetU15_3: 
NetU15_4: 
NetU15_5: 
NetU15_5: 
NetU15_5: 
NetU15_5: 
NetU15_5: 
NetU15_5: 
NetU15_7: 
NetU15_7: 
NetU15_9: 
NetU15_10: 
NetU15_15: 
NetU16_3: 
NetU16_4: 
NetU16_6: 
NetU18_1: 
NetU18_2: 
NetU21_1: 
NetU21_2: 
NetU503_4: 
NetU600_3: 
NetX13_1: 
NetX15_1: 
NetX23_1: 
NetX32_1: 
NetX33_1: 
OFF1: 
OFF2: 
P0_0: 
P0_1: 
P0_2: 
P0_3: 
P0_4: 
P0_5: 
P0_6: 
P0_7: 
P0_8: 
P0_8_: 
P0_8_: 
P0_8_: 
P0_9: 
P0_9_: 
P0_9_: 
P0_9_: 
P0_9_: 
P0_10: 
P0_11: 
P0_12: 
P0_13: 
P0_14: 
P0_15: 
P0_16: 
P0_17: 
P0_18: 
P0_19: 
P0_19: 
P0_20: 
P0_21: 
P0_22: 
P0_22: 
P0_22: 
P0_23: 
P0_24: 
P0_25: 
P0_27: 
P0_28: 
P0_29: 
P0_30: 
P1_16: 
P1_17: 
P1_18: 
P1_19: 
P1_20: 
P1_21: 
P1_21: 
P1_22: 
P1_23: 
P1_24: 
P1_25: 
P1_26: 
P1_27: 
P1_28: 
P1_29: 
P1_30: 
P1_31: 
PA0: CS1.9 U1.14 | length 47
  Top Layer w0.3: v1(71.75,72.85) 72.2,73.3 72.2,75.8 73.05,76.65 v1(73.05,80.6)
  Bottom Layer w0.3: U1.14 37.439,78.25 40.05,78.25 45.1,73.2 52.45,73.2 52.8,73.55 54.45,73.55 55.2,72.8 56.8,72.8 57.1,72.5 71.4,72.5 v1(71.75,72.85)
PA2: U1.16
PA3: R13.2 U1.17 | length 61.9
  Top Layer w0.3: v1(53.55,72.55) 54,72.1 54,65.9 55.7,64.2 v1(55.7,56.95)
  Top Layer w0.5: R13.2 31.9,53.881 v1(31.9,56.65)
  Bottom Layer w0.3: v1(31.9,56.65) 32.2,56.35 55.1,56.35 v1(55.7,56.95) ; U1.17 37.853,72.95 39.8,72.95 40.2,72.55 v1(53.55,72.55)
PA4: R3.2 U1.20 | length 22.8
  Top Layer w0.3: R3.2@41.15,54.95 42.5,56.3 42.5,64.45 41.55,65.4 41.55,69.85 v1(41.65,69.95)
  Bottom Layer w0.3: U1.20 38.732,69.95 v1(41.65,69.95)
PA5: CS1.5 U1.21 | length 42.8
  Top Layer w0.3: v1(67.8,68.95) v1(67.8,76.35)
  Bottom Layer w0.3: U1.21 38.975,69 67.75,69 v1(67.8,68.95) ; CS1.5 67.76,76.39 v1(67.8,76.35)
PA6: CS1.7 U1.22 | length 47.1
  Top Layer w0.3: v1(70,67.6) v1(70,76.35)
  Bottom Layer w0.3: U1.22 39.018,68.25 66.45,68.25 67.1,67.6 v1(70,67.6) ; CS1.7 69.96,76.39 v1(70,76.35)
PA7: CS1.3 U1.23 | length 43.5
  Top Layer w0.3: v1(65.5,67.15) v1(65.5,76.4)
  Bottom Layer w0.3: U1.23 39.061,67.5 65.15,67.5 v1(65.5,67.15) ; v1(65.5,76.4) 65.6,76.5 65.6,78.1 CS1.3@65.6,78.15
PA9: JP10.3 U1.42 | length 43.1
  Top Layer w0.3: v1(19.7,69.1) 19.7,70.5 19,71.2 19,75.75 19.7,76.45 19.7,79.45 18.5,80.65 18.5,86.4 20.3,88.2 v1(20.3,88.45)
  Bottom Layer w0.3: v1(19.7,69.1) 23.339,69.1 U1.42 ; v1(20.3,88.45) 21,88.45 22,89.45 31.668,89.45 JP10.3
PA10: JP10.4 U1.43 | length 42.9
  Top Layer w0.3: v1(18.7,70.05) 18.75,70.05 18.725,70.075 18.4,70.4 18.4,76.05 19.05,76.7 19.05,79.2 17.85,80.4 17.85,86.75 19.2,88.1 19.2,90.6 v1(19.55,90.95)
  Bottom Layer w0.3: v1(18.7,70.05) 18.75,70 23.532,70 U1.43 ; v1(19.55,90.95) 22.15,90.95 23,90.1 29.778,90.1 JP10.4
PA13: JP9.2 U1.46 | length 36.7
  Top Layer w0.3: v1(11.55,72.1) 11.55,82.543 11.3,82.793 11.3,91.007 11.55,91.257 11.55,93.3 12.79,94.54 JP9.2
  Bottom Layer w0.3: v1(11.55,72.1) 23.511,72.1 U1.46
PA14: JP9.4 U1.49 | length 24
  Top Layer w0.3: v1(14.3,83.55) 14.3,93.3 JP9.4
  Bottom Layer w0.3: v1(14.3,83.55) 16.647,83.55 U1.49
PA15: JP9.8 U1.50 | length 33.9
  Top Layer w0.3: v1(12.7,83.6) 12.7,89.7 v1(12.75,89.75) ; JP9.8 20.75,94.41 v1(20.75,89.9)
  Bottom Layer w0.3: v1(12.7,83.6) 13.6,84.5 16.404,84.5 U1.50 ; v1(12.75,89.75) 20.6,89.75 v1(20.75,89.9)
PB0: R15.1 U1.26 | length 30.1
  Top Layer w0.3: R15.1 33.783,58.133 v1(33.8,58.15) ; v1@40.25,65.65 40.35,65.65 41.85,64.15 41.85,58.55 v1(41.5,58.2)
  Bottom Layer w0.3: v1(33.8,58.15) 34.25,58.6 41.1,58.6 v1(41.5,58.2) ; U1.26 38.789,65.65 v1@40.25,65.65
  other v1: 40.2,65.45
PB1: R17.1 U1.27 | length 57.8
  Top Layer w0.3: R17.1 36.276,41.024 v1(36.3,41) ; v1(48.15,65.05) 48.15,53.5 50.15,51.5 50.15,41.05 v1(50.3,40.9)
  Bottom Layer w0.3: U1.27 39.232,64.5 40.9,64.5 41,64.6 47.7,64.6 v1(48.15,65.05) ; v1(36.3,41) 50.2,41 v1(50.3,40.9)
PB1: 
PB2: R19.1 U1.28 | length 106.8
  Top Layer w0.4: v1@52.6,64.4 52.7,64.3 v1(52.7,61.1) ; v1(61.3,61) 61.3,60.35 65.25,56.4 65.25,49.3 65.9,48.65 65.9,42.75 68.95,39.7 v1(68.95,32.5)
  Top Layer w0.5: v1@34.675,31.225 34.6,31.15 34.6,29.25 35.183,28.667 R19.1
  Bottom Layer w0.3: U1.28 39.025,64 52.15,64 v1(52.65,64.5) ; v1(34.7,31.2) 35.15,31.65 51.1,31.65 51.95,32.5 v1(68.95,32.5) ; v1(52.7,61.1) 53.05,61.45 60.85,61.45 v1(61.3,61)
PB2: 
PB3: JP9.6 U1.55 | length 20.3
  Top Layer w0.3: v1(16.8,88.55) 16.8,93.26 JP9.6
  Bottom Layer w0.3: v1(16.8,88.55) 16.8,87.639 U1.55
PB3: 
PB4: JP9.5 U1.56 | length 16.5
  Top Layer w0.3: JP9.5@18.05,92 18.1,92 18.15,91.95 v1(18.15,88.55)
  Bottom Layer w0.3: v1(18.15,88.55) 18.15,86.996 U1.56
PB6: R35.1 U1.58 U9.6 | length 105.1
  Top Layer w0.3: v1(20.65,86.5) 20.75,86.4 22.3,86.4 26.8,90.9 v1(26.8,93.4) ; v1(54.9,94.75) 56.2,93.45 v1(56.2,71.9) ; v1(72.85,71.85) 72.85,75.4 76.15,78.7 v1(76.15,82.1)
  Bottom Layer w0.3: v1(20.65,86.5) 20.65,85.911 U1.58 ; v1(26.8,93.4) 26.9,93.5 41,93.5 42.65,95.15 54.5,95.15 v1(54.9,94.75) ; v1(56.2,71.9) 56.235,71.865 U9.6 ; R35.1 76.143,82.107 v1(76.15,82.1)
PB7: R36.1 U1.59 U9.5 | length 109
  Top Layer w0.3: v1(21.95,87.6) 25.65,91.3 v1(25.65,95.8) ; v1(57.3,70.55) 57.3,92.6 ; v1(74.4,70.595) 74.4,76 78.95,80.55 v1(78.95,82)
  Top Layer w0.4: v1(56.45,94.95) 57.25,94.15 57.25,92.6
  Bottom Layer w0.3: v1(21.95,87.6) 21.95,85.318 U1.59 ; v1(25.65,95.8) 25.8,95.95 55.45,95.95 v1(56.45,94.95) ; v1(57.3,70.55) 57.345,70.595 U9.5 ; v1(78.95,82) 78.95,83.044 R36.1
PB10: R1.2 R6.1 U1.29 | length 55.4
  Top Layer w0.4: v1(68.95,63.5) 68.95,51.2 70.7,51.2 70.712,51.188 R6.1
  Bottom Layer w0.3: U1.29 38.818,63.5 v1(68.95,63.5)
PB11: Q4.3 R8.2 U1.30 | length 67.1
  Top Layer w0.4: v1(67.95,62.4) 68.15,62.2 68.15,50.5 69.5,49.15 v1(69.5,43.25)
  Top Layer w0.5: Q4.3 76.395,43.5 v1(77.05,43.5)
  Bottom Layer w0.3: U1.30 38.761,62.85 67.5,62.85 v1(67.95,62.4) ; v1(69.5,43.25) 69.538,43.288 R8.2
  Bottom Layer w0.4: R8.2 76.838,43.288 v1(77.05,43.5)
PB12: Q5.3 R20.2 U1.33 | length 93
  Top Layer w0.3: v1(28,61.7) 27.3,62.4 27.3,63.6 28.85,65.15 v1(28.85,65.45)
  Top Layer w0.4: v1(66.8,61.5) 67.2,61.1 67.2,49.9 68.2,48.9 68.2,42.75 70,40.95 v1(70,26.25)
  Top Layer w0.5: Q5.3@76,25.95 76.3,26.25 v1(77.1,26.25)
  Bottom Layer w0.3: v1(28,61.7) 28.55,61.15 42.35,61.15 43.3,62.1 66.2,62.1 v1(66.8,61.5) ; v1(28.85,65.45) 28.85,66.45 28.15,67.15 28.15,67.547 U1.33 ; v1(70,26.25) 70.026,26.276 R20.2
  Bottom Layer w0.4: R20.2 77.074,26.276 v1(77.1,26.25)
PB13: U1.34 U7.2 U8.6 | length 71.1
  Top Layer w0.3: v1(26.9,60.9) 26.85,60.9 26.55,61.2 26.55,64.15 27.6,65.2 v1(27.6,66.3) ; v1(44.75,94.2) 44.85,94.1 44.85,60.95 v1(44.9,60.9)
  Bottom Layer w0.3: v1(26.9,60.9) 27.25,60.55 42.65,60.55 43,60.9 v1(44.9,60.9) v1@44.9,60.85 ; v1(27.6,66.3) 27.4,66.5 27.4,67.504 U1.34 ; v1(44.75,94.2) 50.3,94.2 51.565,92.935 U7.2 ; v1(44.85,90.7) 44.85,90.695 44.873,90.673 U8.6
PB14: U1.35 U7.8 U8.2 | length 62.1
  Top Layer w0.3: v1(25.95,58.55) 26,58.6 26,60.4 25.6,60.8 25.6,64.35 26.25,65 v1(26.25,66.25) ; v1(46.1,58.9) 46.15,58.95 v1(46.15,81.95)
  Bottom Layer w0.3: v1(25.95,58.55) 26.65,59.25 42.6,59.25 43,58.85 46.05,58.85 v1(46.1,58.9) ; v1(26.25,66.25) 26.25,67.061 U1.35 ; U8.2 46.143,81.957 v1(46.15,81.95) 46.5,82.3 U7.8
PB15: U1.36 U7.1 U8.5 | length 72.8
  Top Layer w0.3: v1(24.9,65.6) 24.9,59.8 v1(25,59.7) ; v1(43.55,91.4) 43.6,91.35 v1(43.6,59.85)
  Bottom Layer w0.3: v1(24.9,65.6) 24.9,66.418 U1.36 ; v1(25,59.7) 25.15,59.85 v1(43.6,59.85) ; v1(43.55,91.4) v1@43.603,91.4 ; U8.5 43.603,91.503 45.4,93.3 50,93.3 50.295,93.005 U7.1
PC0: U1.8 U8.1 | length 18.8
  Bottom Layer w0.3: U1.8 40.346,85.4 40.95,85.4 42.35,86.8 46.8,86.8 47.45,86.15 47.45,84.05 U8.1@47.5,84.1
PC1: U1.9 U7.4 | length 39.2
  Top Layer w0.3: v1(42.15,84.75) 42.5,84.4 v1(42.5,80.25) ; v1(54.65,89.35) 55.25,88.75 v1(55.25,80.25)
  Bottom Layer w0.3: U1.9 40.404,84.75 v1(42.15,84.75) ; v1(42.5,80.25) v1(55.25,80.25) ; U7.4 54.105,89.895 v1(54.65,89.35)
PC2: CS1.2 U1.10 | length 64.9
  Top Layer w0.3: v1(41.3,83.4) 41.25,83.35 41.25,80.05 42.45,78.85 v1(42.45,78.2) ; v1(55.15,66.55) v1(55.15,78.4) ; v1(64,66.3) 64,67.9 64.3,68.2 64.3,80.15 v1(64.35,80.2)
  Bottom Layer w0.3: U1.10 39.761,83.4 v1(41.3,83.4) ; v1(42.45,78.2) 43.6,79.35 54.2,79.35 v1(55.15,78.4) ; v1@55.1,66.55 v1(55.15,66.55) ; v1@55.1,66.65 63.65,66.65 v1(64,66.3) ; v1(64.35,80.2) 64.45,80.1 CS1.2@64.45,78.05
PC4: R16.1 U1.24 | length 88.1
  Top Layer w0.3: v1(65.6,65.8) 65.6,61.05 66.15,60.5 v1(66.15,58.8)
  Top Layer w0.5: R16.1 24.983,55.683 v1(27.35,58.05)
  Bottom Layer w0.3: v1(27.35,58.05) 27.65,58.35 32,58.35 33.25,57.1 34.5,57.1 35.4,58 40.25,58 41,57.25 42,57.25 42.75,58 46.75,58 47.55,58.8 v1(66.15,58.8) ; U1.24 38.954,66.9 53.3,66.9 54.6,65.6 55.75,65.6 56.05,65.9 63.05,65.9 63.65,65.3 65.1,65.3 v1(65.6,65.8)
PC5: R18.1 U1.25 | length 66.1
  Top Layer w0.4: v1(62.6,64.7) 62.6,60.35 66.15,56.8 66.15,49.7 67,48.85 v1(67,43.25)
  Top Layer w0.5: R18.1 56.733,42.017 v1(56.8,41.95)
  Bottom Layer w0.3: U1.25 38.796,66.35 52.85,66.35 54.3,64.9 62.4,64.9 v1(62.6,64.7) ; v1(56.8,41.95) 65.7,41.95 v1(67,43.25)
PC6: U1.37 U2.11 | length 38.5
  Top Layer w0.3: v1(17.85,77.3) 17.55,77 17.55,68.9 18.5,67.95 v1(18.5,64.8)
  Bottom Layer w0.3: U2.11 3.933,77.95 15.45,77.95 16.1,77.3 v1(17.85,77.3) ; v1(18.5,64.8) 22.575,64.8 U1.37
PC7: U1.38 U2.12 | length 41.4
  Top Layer w0.3: v1(17.1,78.75) 16.7,78.35 16.7,68.85 17.25,68.3 v1(17.25,66)
  Bottom Layer w0.3: U2.12@1.4,77.9 2.65,79.15 15.5,79.15 15.9,78.75 v1(17.1,78.75) ; v1(17.25,66) 23.068,66 U1.38
PC8: U1.39 U2.13 | length 38.3
  Top Layer w0.3: v1(16.1,67.15) 16.1,68.6 15.8,68.9 15.8,79.75 v1(16.3,80.25)
  Bottom Layer w0.3: U2.13@3.85,80.45 3.95,80.35 16.2,80.35 v1(16.3,80.25) ; v1(16.1,67.15) 23.511,67.15 U1.39
PC9: U1.40 U2.14 | length 40.5
  Top Layer w0.3: v1(15,68.25) v1(15,81.35)
  Bottom Layer w0.3: U2.14 2.783,81.8 14.55,81.8 v1(15,81.35) ; v1(15,68.25) 17.1,68.25 17.4,67.95 20.55,67.95 20.85,68.25 23.904,68.25 U1.40
PC10: U1.51 U2.4 | length 42.9
  Top Layer w0.3: v1(6.6,69.2) v1(6.6,85.05)
  Bottom Layer w0.3: U2.4 2.683,69 6.4,69 v1(6.6,69.2) ; v1(6.6,85.05) 16.561,85.05 U1.51
PC11: U1.52 U2.6 | length 42.1
  Top Layer w0.3: v1(7.55,71.5) 7.4,71.65 7.4,83.9 7.8,84.3 v1(7.8,86.1)
  Bottom Layer w0.3: U2.6 2.683,71.5 v1(7.55,71.5) ; v1(7.8,86.1) 7.95,85.95 16.368,85.95 U1.52
PE6: 
PE6: 
PE7: 
PQ1: 
PQ2: 
PQ3: 
PQ4: 
PQ5: 
PQ6: 
PROG0: 
PROG1: 
PROG1: 
PROG1: 
PWM: 
PWM0: 
PWM1: 
PWM2: 
REL1: 
REL1: 
REL2: 
REL3: 
REL4: 
REL5: 
REL6: 
RES: JP9.10 U1.7 | length 35.4
  Top Layer w0.3: v1(40.45,94.8) 40.55,94.7 v1(40.55,86.55)
  Bottom Layer w0.3: JP9.10 40.19,94.54 v1(40.45,94.8) ; U1.7 40.55,86.311 v1(40.55,86.55)
RST: 
RTX: 
RX: 
RXCAN: 
SCK: 
SK1: 
SK2: 
SK3: 
SK4: 
SWIM: 
T3: 
T3: 
TD1: 
TX: 
U2: 
U5: 
U6: 
U7: 
U8: 
UAKB: 
UB1: 
UB2: 
UBM1: 
UBM2: 
UIB1: 
UIB2: 
ULOAD: 
US: 
US1: 
US1: 
US1: 
US1: 
US1: 
US1: 
US1: 
US1: 
US1: 
UTX: 
UU1: 
UU2: 
UU3: 
UU4: 
UU5: 
UU6: 
UU7: 
UU8: 
UU9: 
UU10: 
UU11: 
UU12: 
UU13: 
UU14: 
VREF: 
VS: 
VS: 
pads on no net: CS1.1 CS1.8 JP1.0 JP2.0 JP3.0 JP4.0 JP5.0 JP6.0 JP7.0 JP8.0 JP10.5 U1.1 U1.2 U1.3 U1.4 U1.5 U1.6 U1.11 U1.15 U1.41 U1.44 U1.45 U1.53 U1.54 U1.57 U1.61 U1.62 U2.0 U2.7 U2.8 U2.9 U2.10 U3.1 U3.2 U3.3 U4.1 U4.2 U4.7 U4.10 U4.11

## Polygon pours and split planes (outlines as drawn)
GND on Top Layer (hatched 90Degree grid 0.1 track 0.3, remove dead copper): -2.55,25.05 30.85,25.05 30.85,-2.5 87.45,-2.5 87.45,100 -2.5,100 -2.5,25.05
+3V3 on Top Layer (hatched 90Degree grid 0.1 track 0.3, remove dead copper): 37.1,98.75 37.1,89.95 51.85,75.2 70.1,75.2 74.1,71.2 74.1,64.6 85.7,64.6 85.7,99.25 37.1,99.25
GND on Bottom Layer (hatched 90Degree grid 0.1 track 0.3, remove dead copper): -2.5,25 30.85,25 30.85,-2.55 87.5,-2.55 87.5,100.05 -2.5,100.05
+3V3 on Bottom Layer (hatched 90Degree grid 0.1 track 0.3, remove dead copper): 30.5,84.3 21.25,75.05 30.2,66.1 39.2,75.1 30.25,84.05

## Keep-outs
Keep-Out Layer:
  lines w0.3: 0,0 0,97.5 85,97.5 85,0 0,0

## Text inside footprints (layer, text, board x,y; h text height)
U5: Bottom Overlay "3" at 17.815,37.776 h1 r180; Bottom Overlay "1" at 12.993,37.776 h1 r180
U6: Bottom Overlay "3" at 13.779,46.129 h1; Bottom Overlay "1" at 18.601,46.129 h1